# EAGLE board BSPD Schema v1.0 (EAGLE 9.6.2)
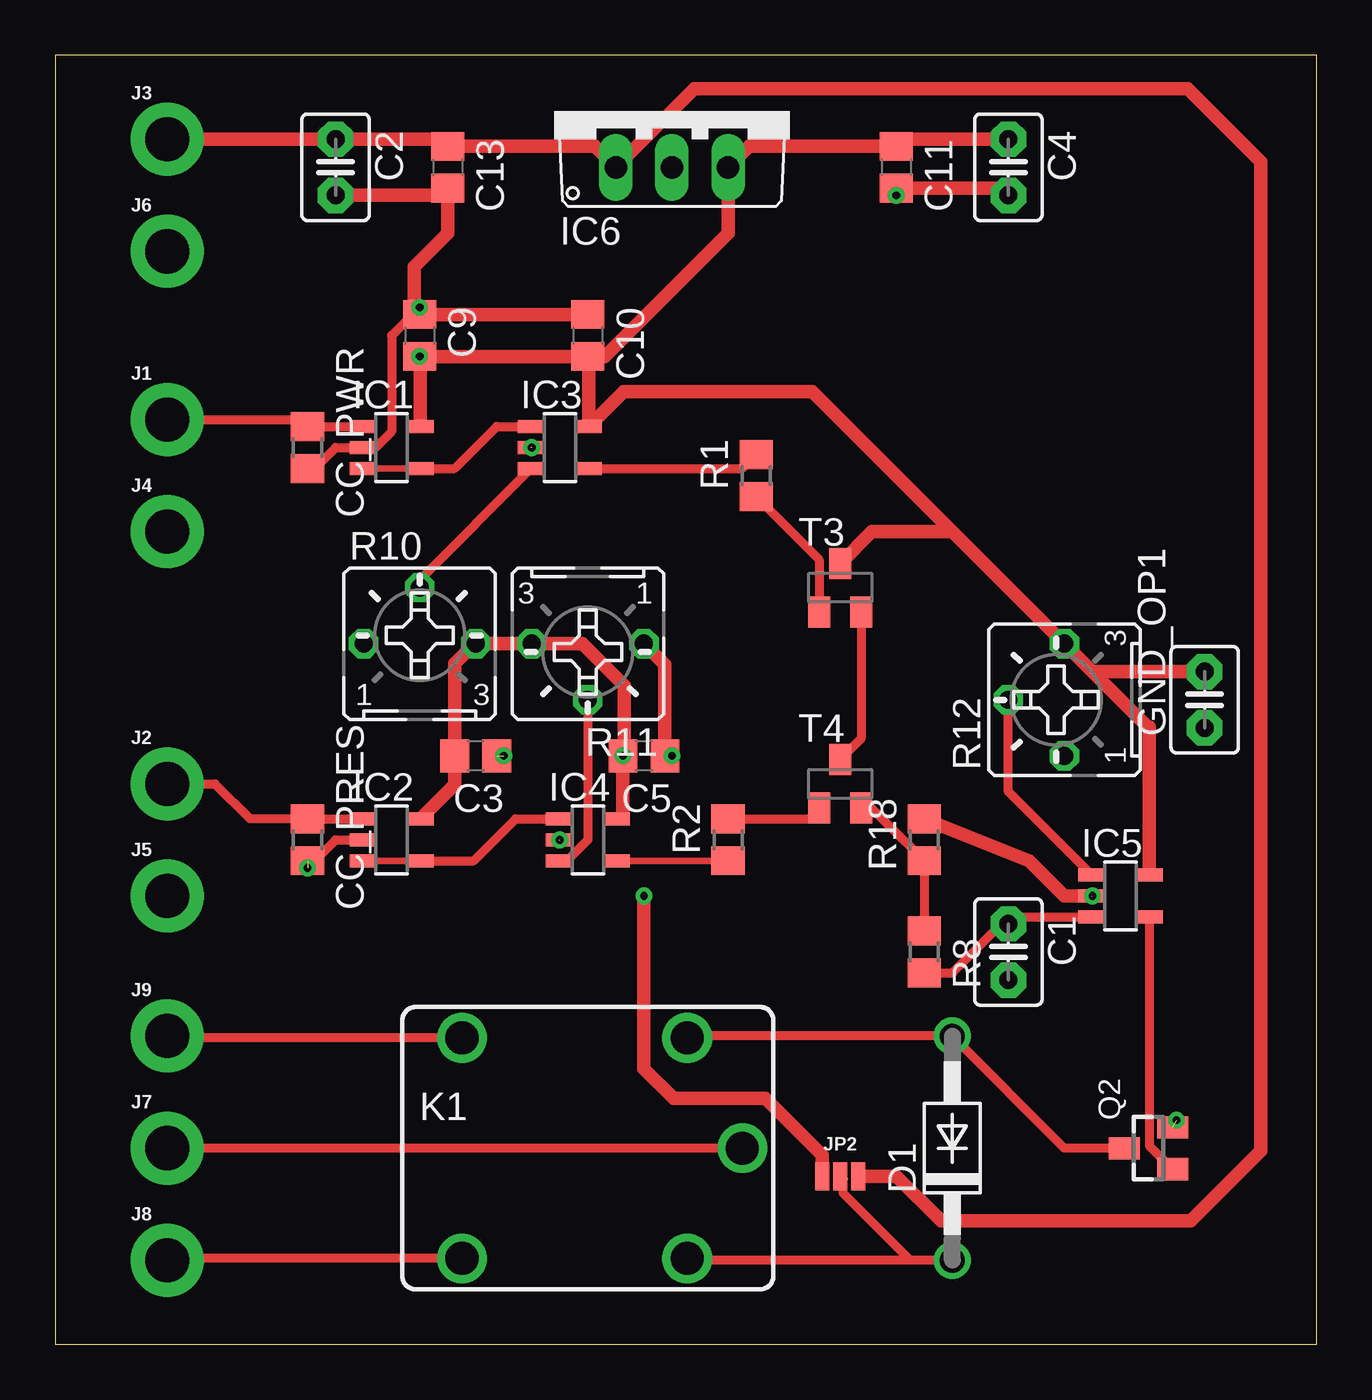
[diagram p0: board, top side]
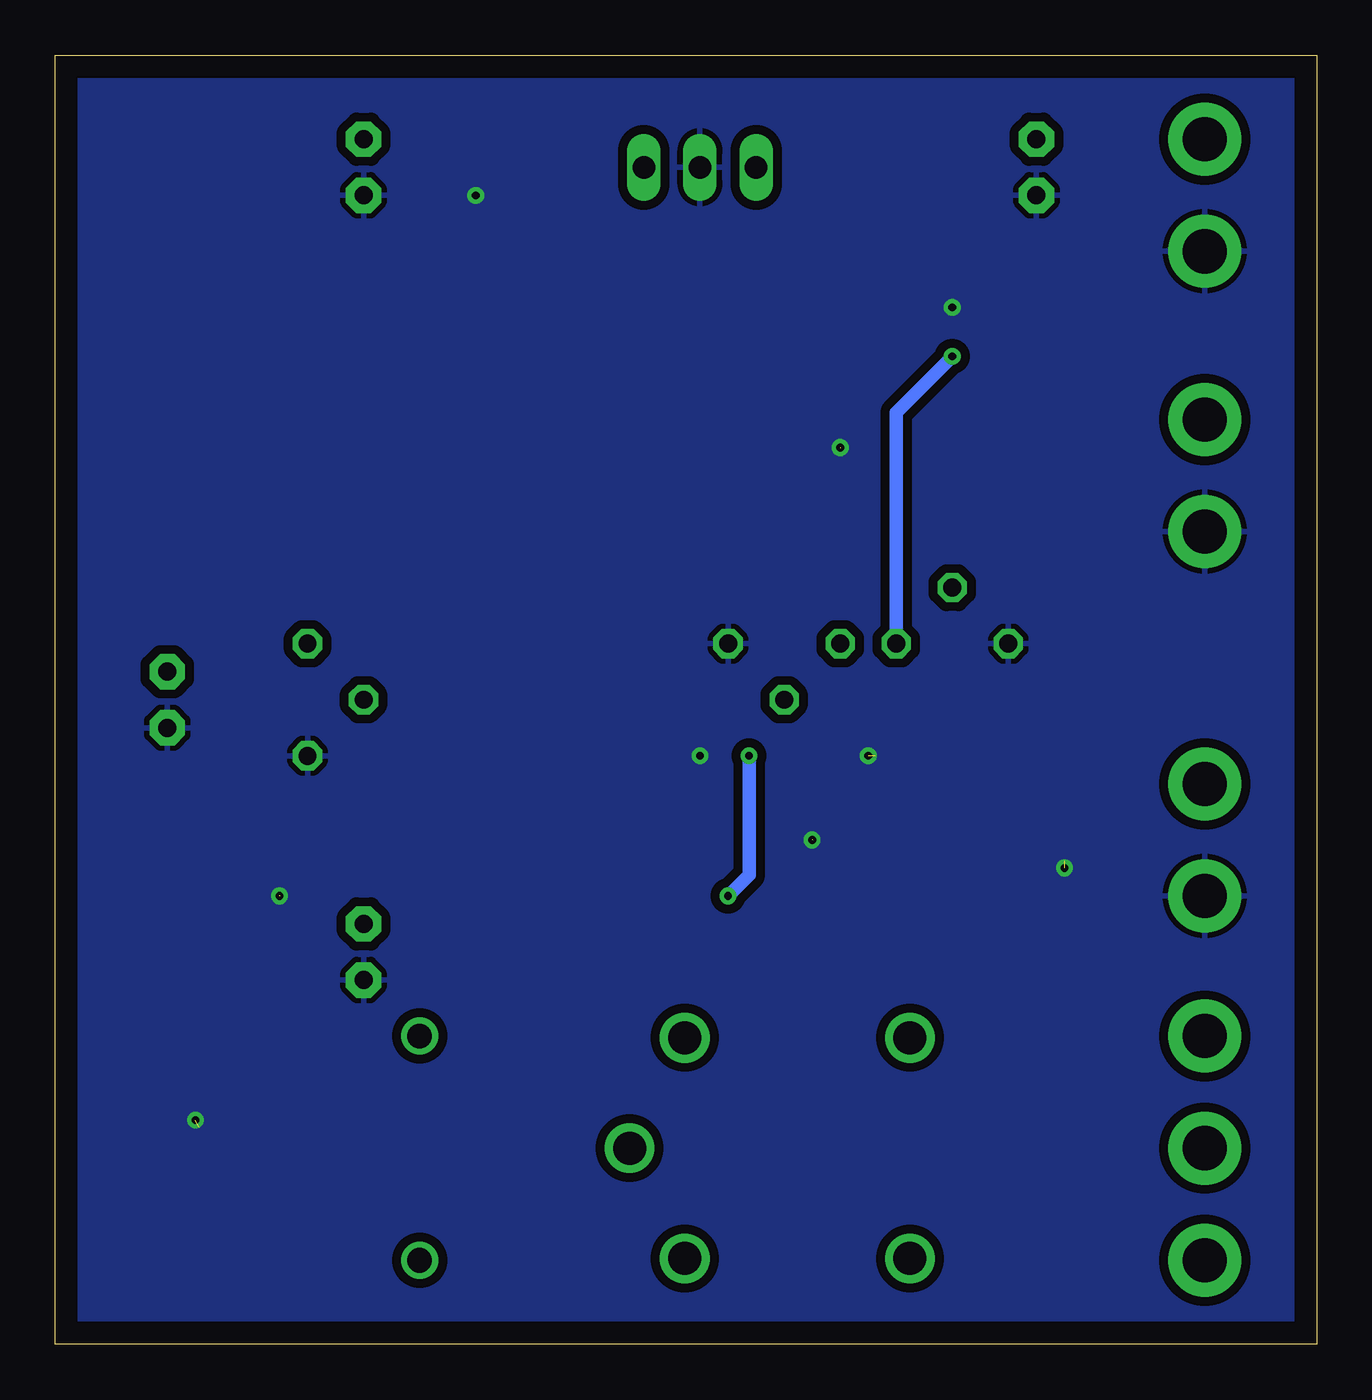
[diagram p1: board, bottom side, seen from below]

Size 57.15 x 58.42 mm. Coordinates in mm from the lower left corner, seen from the top.
Outline: 0,0 57.15,0 57.15,58.42 0,58.42 0,0
Copper layers (1*16): Top 0.035mm / dielectric 1.5mm / Bottom 0.035mm
Design rules "default *": minimum track width 6mil, minimum drill 0.35mm, track to track 6mil, track to pad 6mil, pad to pad 6mil, via to via 6mil, smd to smd 6mil, copper to edge 40mil, drill to drill 6mil, minimum pad ring 10mil, minimum via ring 8mil, stop-mask expansion 4mil, vias tented up to drill 0mil, thermal gap 10mil

## Footprints (pad centres in the part's own frame; a part is rotated, then mirrored left to right if it is on the bottom)
C2.5-3 = drill 0.813 pad 1.6 octagon: 1 -1.27,0; 2 1.27,0
C0805 = smd 1.3 x 1.5: 1 -0.95,0; 2 0.95,0
R0805 = smd 1.3 x 1.5: 1 -0.95,0; 2 0.95,0
DO41-10 = drill 1.118: A 5.08,0; C -5.08,0
SOT23-5 = smd 0.6 x 1.2: 1 -0.95,-1.306; 2 0,-1.306; 3 0.95,-1.306; 4 0.95,1.306; 5 -0.95,1.306
TO220V = drill 1.016 long: 1 -2.54,-2.54; 2 0,-2.54; 3 2.54,-2.54
1X01_2MM = drill 2 pad 3.302: 1 0,0
SMT-JUMPER_3_NO_NO-SILK = smd 0.635 x 1.27: 1 -0.813,0; 2 0,0; 3 0.813,0
CQ1 = drill 1.5: 1 4.5,-5; 2 4.5,5; C 7,0; NC -5.7,-5; NO -5.7,5
SOT23 = smd 1 x 1.4: 1 -0.95,-1.1; 2 0.95,-1.1; 3 0,1.1
B25P = drill 0.813 octagon: A -2.54,0; E 2.54,0; S 0,2.54
SOT23-BEC = smd 1 x 1.4: B -0.95,-1.1; C 0,1.1; E 0.95,-1.1

## Placement (x,y rotation side)
C1  100uF  [C2.5-3]  43.18,17.78 270 top
C2  100uF  [C2.5-3]  12.7,53.34 270 top
C3  0.1uF  [C0805]  19.05,26.67 180 top
C4  100uF  [C2.5-3]  43.18,53.34 270 top
C5  0.1uF  [C0805]  26.67,26.67 180 top
C9  0.1uF  [C0805]  16.51,45.72 270 top
C10  0.1uF  [C0805]  24.13,45.72 270 top
C11  10uF  [C0805]  38.1,53.34 270 top
C13  10uF  [C0805]  17.78,53.34 270 top
CC_PRES  [R0805]  11.43,22.86 90 top
CC_PWR  [R0805]  11.43,40.64 90 top
D1  1N4004  [DO41-10]  40.64,8.89 90 top
GND_OP1  0.1uF  [C2.5-3]  52.07,29.21 90 top
IC1  LMV321M5  [SOT23-5]  15.24,40.64 270 top
IC2  LMV321M5  [SOT23-5]  15.24,22.86 270 top
IC3  LMV321M5  [SOT23-5]  22.86,40.64 270 top
IC4  LMV321M5  [SOT23-5]  24.13,22.86 270 top
IC5  LMV321M5  [SOT23-5]  48.26,20.32 270 top
IC6  7805TV  [TO220V]  27.94,55.88 0 top
J1  Power In  [1X01_2MM]  5.08,41.91 0 top
J2  Pressure In  [1X01_2MM]  5.08,25.4 0 top
J3  Vcc  [1X01_2MM]  5.08,54.61 0 top
J4  GND  [1X01_2MM]  5.08,36.83 0 top
J5  GND  [1X01_2MM]  5.08,20.32 0 top
J6  GND  [1X01_2MM]  5.08,49.53 0 top
J7  C  [1X01_2MM]  5.08,8.89 0 top
J8  NC  [1X01_2MM]  5.08,3.81 0 top
J9  NO  [1X01_2MM]  5.08,13.97 0 top
JP2  JUMPER-SMT_3_NO_NO-SILK  [SMT-JUMPER_3_NO_NO-SILK]  35.56,7.62 0 top
K1  CQ1-12V  [CQ1]  24.13,8.89 0 top
Q2  SI2302  [SOT23]  49.53,8.89 90 top
R1  10k  [R0805]  31.75,39.37 90 top
R2  10k  [R0805]  30.48,22.86 90 top
R8  5.1k  [R0805]  39.37,17.78 270 top
R10  10k  [B25P]  16.51,31.75 0 top
R11  10k  [B25P]  24.13,31.75 180 top
R12  10k  [B25P]  45.72,29.21 90 top
R18  4.7k  [R0805]  39.37,22.86 270 top
T3  [SOT23-BEC]  35.56,34.29 0 top
T4  [SOT23-BEC]  35.56,25.4 0 top

## Library data of the parts
C1 C2 C4 GND_OP1 = capacitor-wima
C3 C5 C9-C11 C13 = rcl; SPICEPREFIX: C
CC_PRES CC_PWR R1 R2 R8 R18 = rcl; SPICEPREFIX: R
D1 = diode
IC1-IC6 = linear
J1 = SparkFun-Connectors; SPICEPREFIX: X
J2-J9 = SparkFun-Connectors
JP2 = SparkFun-Jumpers
K1 = relay; OC_FARNELL: unknown; OC_NEWARK: unknown
Q2 = SI230x; AVAILABILITY: Unavailable; DESCRIPTION: N-Channel 20V 2.6A _Ta_ 710mW _Ta_ Surface Mount SOT-23-3 _TO-236_; MF: Vishay Siliconix; MP: SI2302; PACKAGE: SOT-23-3 Vishay Siliconix; PRICE: None
R10-R12 = pot
T3 T4 = transistor

## Nets
5V: C3.2 C4.1 C5.2 C9.2 C10.2 C11.1 GND_OP1.2 IC1.5 IC2.5 IC3.5 IC4.5 IC5.5 IC6.3 JP2.1 R10.E R11.E R12.E T3.C
12V: C2.1 C13.1 IC6.1 J3.1 JP2.3
ANDOP: R8.1 R18.2 T4.E
GND: C1.2 C2.2 C3.1 C4.2 C5.1 C9.1 C10.1 C11.2 C13.2 CC_PRES.1 CC_PWR.1 GND_OP1.1 IC1.2 IC2.2 IC3.2 IC4.2 IC5.2 IC6.2 J4.1 J5.1 J6.1 Q2.2 R10.A R11.A R12.A R18.1
N$1: IC3.3 R10.S
N$2: IC4.3 R11.S
N$3: IC1.3 IC1.4 IC3.1
N$4: IC2.3 IC2.4 IC4.1
N$5: IC3.4 R1.2
N$6: IC4.4 R2.1
N$7: R1.1 T3.B
N$8: R2.2 T4.B
N$9: IC5.1 R12.S
N$10: T3.E T4.C
N$12: C1.1 IC5.3 R8.2
N$13: D1.C JP2.2 K1.1
N$14: D1.A K1.2 Q2.3
N$15: IC5.4 Q2.1
N$16: CC_PWR.2 IC1.1 J1.1
N$17: CC_PRES.2 IC2.1 J2.1
N$18: J7.1 K1.C
N$19: J8.1 K1.NC
N$20: J9.1 K1.NO

## Tracks (layer width: path | path; a pad name or v marks a point on that pad's centre or on a via)
5V  (via drill 0.35)
  Top 0.152: 37.78,54.61 C11.1 38.42,54.61 | C9.2 16.55,44.73 | C10.2 24.17,44.73 | 25.72,24.09 IC4.5
  Top 0.406: T3.C 35.73,35.56 | 49.49,27.98 49.57,27.98
  Top 0.61: C11.1 31.43,54.29 IC6.3 30.48,50.36 24.89,44.77 C10.2 C9.2 | C4.1 38.42,54.61 | 16.55,44.73 IC1.5 | 24.17,44.73 IC3.5 25.76,43.18 34.29,43.18 40.64,36.83 | IC2.5 18.1,25.36 C3.2 18.1,30.86 18.99,31.75 R10.E R11.E 23.88,31.75 25.78,29.84 25.78,26.73 C5.2 25.72,24.09 | v26.67,20.32 26.67,12.49 28.02,11.14 32.17,11.14 34.75,8.56 JP2.1 | 49.57,27.98 IC5.5 | GND_OP1.2 46.99,30.48 | 46.99,30.48 R12.E 40.64,36.83 | 46.99,30.48 49.49,27.98 | T3.C 37,36.83 40.64,36.83
  Bottom 0.61: v26.67,20.32 25.72,21.27 C5.2 | R10.E 19.05,42.23 C9.2
  other vias: 25.72,26.67 16.51,44.77
12V
  Top 0.152: 17.46,54.61 C13.1
  Top 0.61: J3.1 C2.1 17.46,54.61 | C13.1 24.45,54.29 IC6.1 28.96,56.9 51.31,56.9 54.61,53.59 54.61,8.76 51.44,5.59 40.13,5.59 38.1,7.62 JP2.3
ANDOP
  Top 0.406: T4.E 36.98,24.3 38.47,22.8 38.48,22.8 R18.2 R8.1
GND  (via drill 0.35)  (6 unrouted)
  Top 0.406: CC_PWR.1 11.75,39.69 12.7,40.64 IC1.2 13.97,40.68 | CC_PRES.1 11.75,21.91 12.7,22.86 IC2.2 | C9.1 16.19,46.67 15.24,45.72 15.24,41.37 14.51,40.64 13.97,40.64
  Top 0.61: R11.A 27.62,30.8 C5.1 | R18.1 44.13,21.91 45.72,20.32 IC5.2 | C10.1 C9.1 16.26,46.92 16.26,48.83 17.78,50.36 C13.2 17.46,52.07 C2.2 | C11.2 42.86,52.39 C4.2 | 13.97,40.64 IC1.2
  other vias: 11.43,21.59 20.32,26.67 22.86,22.86 27.94,26.67 46.99,20.32 50.8,10.16 16.51,46.99 38.1,52.07 21.59,40.64
  pour Bottom (isolate 0.406): 0,58.42 57.15,58.42 57.15,0 0,0
N$1
  Top 0.152: R10.S 16.51,34.65
  Top 0.406: 16.51,34.65 IC3.3
N$2
  Top 0.152: 23.18,21.91 IC4.3
  Top 0.406: R11.S 24.13,22.86 23.18,21.91
N$3
  Top 0.305: IC1.3 IC1.4
  Top 0.406: IC1.4 18.1,39.69 20,41.59 IC3.1
N$4
  Top 0.305: IC2.3 IC2.4
  Top 0.406: IC2.4 18.96,21.91 20.86,23.81 IC4.1
N$5
  Top 0.406: IC3.4 31.12,39.69 R1.2
N$6
  Top 0.305: IC4.4 R2.1
N$7
  Top 0.406: R1.1 34.61,35.56 T3.B
N$8
  Top 0.152: 34.12,23.81 T4.B
  Top 0.406: R2.2 34.12,23.81
N$9
  Top 0.406: IC5.1 43.18,25.04 R12.S
N$10
  Top 0.406: T3.E 36.51,27.45 T4.C
N$12
  Top 0.406: R8.2 40.64,16.83 42.86,19.05 C1.1 43.5,19.37 IC5.3
N$13
  Top 0.152: 28.71,3.81 K1.1 | 35.57,7.61 JP2.2
  Top 0.305: D1.C 40.21,3.81
  Top 0.406: 28.71,3.81 D1.C 38.73,3.81 35.7,6.84 35.7,7.48 JP2.2
N$14
  Top 0.152: 28.71,13.97 K1.2
  Top 0.406: Q2.3 45.72,8.89 D1.A 28.71,13.97
N$15
  Top 0.406: IC5.4 49.57,9 Q2.1
N$16
  Top 0.406: IC1.1 CC_PWR.2 11.11,41.91 J1.1
N$17
  Top 0.152: 13.33,23.81 IC2.1
  Top 0.406: J2.1 7.24,25.4 8.83,23.81 CC_PRES.2 13.33,23.81
N$18
  Top 0.406: K1.C J7.1
N$19
  Top 0.152: 5.16,3.89 J8.1
  Top 0.406: K1.NC 5.16,3.89
N$20
  Top 0.152: 5.16,13.89 J9.1
  Top 0.406: K1.NO 5.16,13.89